# Altium PCB TeensyIMU.PcbDoc
Units mil, origin at the board's own origin, x right, y up, seen from the top; angles counter-clockwise.
Board outline 800 x 2320 mil, 2 copper layers (Top Layer, Bottom Layer); 38 components, 30 nets, 177 pads, 62 vias.
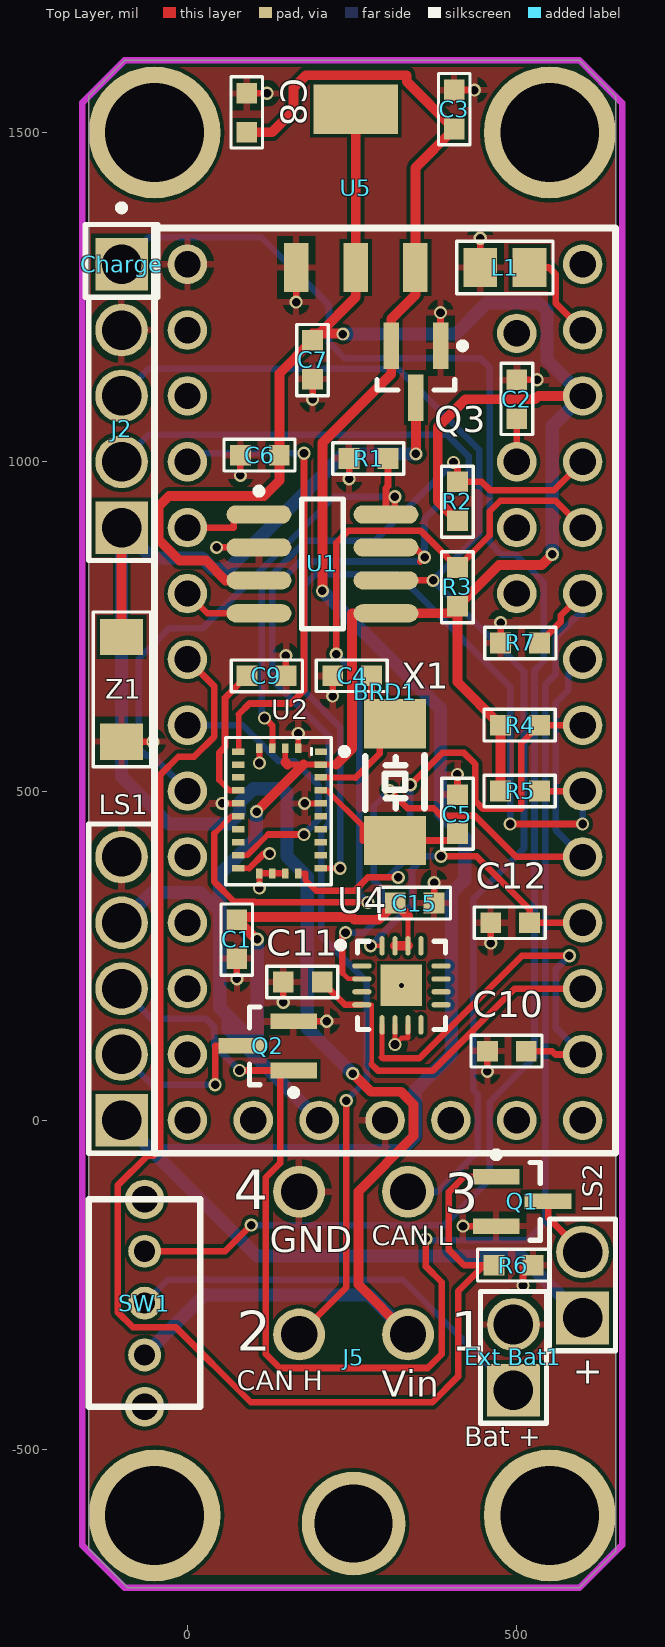
[diagram p0: Top Layer view]
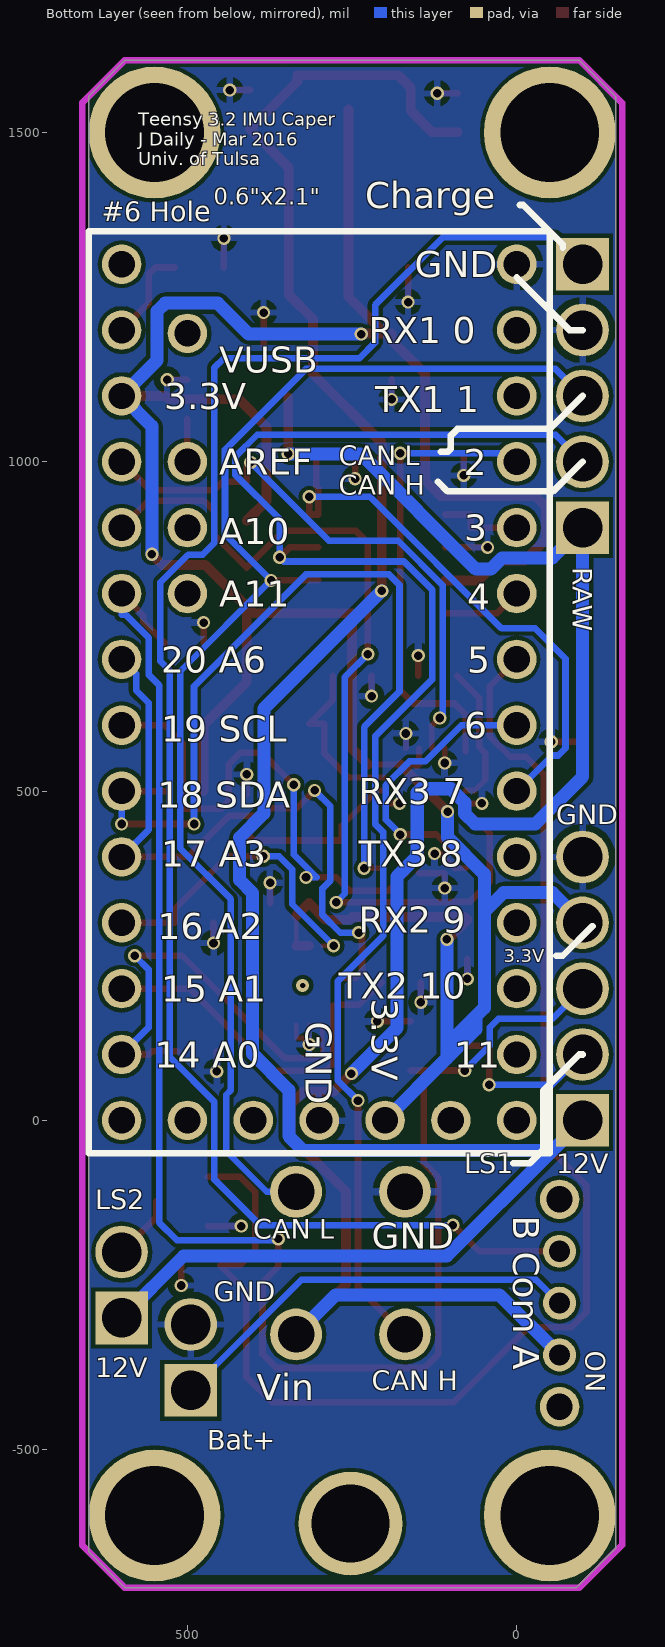
[diagram p1: Bottom Layer view, seen from below]

## Layer stack, top to bottom
Top Solder: solder mask 0.4, Solder Resist, Dk 3.5
Top Layer: signal copper 1.4
Dielectric 1: dielectric 12.6, FR-4, Dk 4.8
Bottom Layer: signal copper 1.4
Bottom Solder: solder mask 0.4, Solder Resist, Dk 3.5

## Board outline
-150,-650 -150,1555 -95,1610 595,1610 650,1555 650,-655 595,-710 -90,-710

## Design rules (kind name [scope] priority, off if disabled: settings)
BoardOutlineClearance [not InNet('GND')] p1: gap=15
Clearance [All] p1: gap=6
HoleSize [All] p1: absolutevalues=TRUE maxlimit=200 minlimit=13 maxpercent=80.000 minpercent=20.000
HoleToHoleClearance [All] p1: gap=10 allowstackedmicrovias=FALSE
MinimumAnnularRing MinimumAnnularRing_2 [All] p1: minimumring=8
PolygonConnect [All] p1: connectstyle=Relief reliefconductorwidth=10 reliefentries=4 polygonreliefangle="90 Angle" airgapwidth=10
RoutingVias [All] p1: holewidth=13 width=27 viastyle="Through Hole" minholewidth=13 minwidth=20 maxholewidth=30 maxwidth=30
SMDNeckDown [All] p1: percent=90.000
SolderMaskExpansion [All] p1: expansion=4
Width Width_1 [InNet('12V0') or InNet('3V3') or InNet('RAW')] p1: maxlimit=20 minlimit=7 preferedwidth=20 toplayer_prefwidth=15 bottomlayer_minwidth=15 minimp=50.000000 maximp=50.000000 favimp=50.000000
Width [All] p2: maxlimit=20 minlimit=7 preferedwidth=10 minimp=50.000000 maximp=50.000000 favimp=50.000000
28 further rules are at their usual default settings.

## Components (designator, comment, footprint, x,y, rotation, side; value= is the part's Value field where it differs from the comment)
BRD1 "Teensy 3.2" Teensy 0,0 r0 top
C1 "0.1 uF" 0603 75,275 r90 top
C2 "0.1 uF" 0603 500,1095 r270 top
C3 "10 uF" 0603 405,1535 r270 top
C4 "12 pF" 0603 250,675 r0 top
C5 "12 pF" 0603 410,465 r270 top
C6 "10 uF" 0603 110,1010 r0 top
C7 "10 uF" 0603 190,1155 r90 top
C8 "0.1 uF" 0603 90,1530 r270 top
C9 "10 uF" 0603 120,675 r180 top
C10 "0.0051uF" 0603 485,105 r0 top
C11 "0.0051uF" 0603 175,210 r0 top
C12 "0.0051uF" 0603 490,300 r0 top
C15 "0.1 uF" 0603 345,330 r180 top
Charge "Charge" PIN1 -100,1305 r0 top
"Ext Bat1" "Header 2" HDR1X2 495,-410 r90 top
J2 "Header" HDR1X4 -100,900 r90 top
J5 "4 Pos Mini-Fit Jr." "4 POS MINI-FIT JR" 335,-325 r0 top
L1 "80 Ohms" 0805 480,1295 r0 top
LS1 "Header 5" HDR1X5 -100,0 r90 top
LS2 "Header 2" HDR1X2 600,-300 r90 top
Q1 "N-FET" SOT-23-3 510,-125 r0 top
Q2 "N-FET" SOT-23-3 120,115 r180 top
Q3 "P-FET" SOT-23-3 345,1135 r270 top
R1 "4.7k" 0603 275,1005 r0 top
R2 "10k" 0603 410,940 r90 top
R3 "10k" 0603 410,810 r90 top
R4 "4.7k" 0603 505,600 r0 top
R5 "4.7k" 0603 505,500 r0 top
R6 "180k" 0603 495,-220 r0 top
R7 "180k" 0603 505,725 r180 top
SW1 "SPST Switch" "Slide Switch R/A" -65,-435 r90 top
U1 "MCP2562T-E/SN" SOIC-SN8_M 205,845 r0 top
U2 "BNO055" "BNO055 LGA" 140,470 r270 top
U4 "ADXL377BCPZ-RL" ADI-CP-16-28_N 325,205 r0 top
U5 "LDO1117" SOT-223 165,1295 r0 top
X1 "32.768KHz" "XTAL 2 pad" 315,425 r90 top
Z1 "SMA6J" SMA -100,575 r90 top

## Footprints (in the part's own frame and the unit in brackets; to place one, negate y for a bottom-side part, rotate by r counter-clockwise, add the part's x,y. Pads: shape width x height; smd on the part's side, far side on the other; paste and mask are expansions set on the pad)
"4 POS MINI-FIT JR" [mm] "Vertical Header"
  round 4 hole 3: 0(-2.1,-7.3)
  round 2 hole 1.4: 1(0,0) 2(-4.2,0) 3(0,5.5) 4(-4.2,5.5)
0603 [mm] "0603 SMP Component with outline"
  rect 0.8x0.8 smd: 1(-0.75,0) 2(0.75,0)
  silkscreen extent -1.39,-0.61 1.36,0.61
0805 [mm]
  rect 1.3x1.5 smd: 1(-0.899,0) 2(1.001,0)
  silkscreen extent -1.8,-1.02 1.91,1.02
ADI-CP-16-28_N [mm] "QFN, 16-Leads, Body 3x3mm, Pitch 0.5mm, Thermal Pad 1.6x1.6mm, IPC Medium Density"
  oval 0.75x0.2 smd: 1(-1.525,0.75) 2(-1.525,0.25) 3(-1.525,-0.25) 4(-1.525,-0.75) 9(1.525,-0.75) 10(1.525,-0.25) 11(1.525,0.25) 12(1.525,0.75)
  oval 0.2x0.75 smd: 5(-0.75,-1.525) 6(-0.25,-1.525) 7(0.25,-1.525) 8(0.75,-1.525) 13(0.75,1.525) 14(0.25,1.525) 15(-0.25,1.525) 16(-0.75,1.525)
  rect 1.6x1.6 smd: 17(0,0)
  silkscreen extent -2.47,-1.7 1.7,1.7, body extent -1.55,-1.55 1.55,1.55, height 1.5
"BNO055 LGA" [mm] "BOSCH BNO055  Intelligent 9-axis absolute orientation sensor"
  rect 0.25x0.475 smd: 1(-2.286,1.594) 6(-2.286,-1.594) 7(-1.786,-1.594) 8(-1.286,-1.594) 9(-0.786,-1.594) 10(-0.286,-1.594) 11(0.214,-1.594) 12(0.714,-1.594) 13(1.214,-1.594) 14(1.714,-1.594) 15(2.214,-1.594) 20(2.214,1.58) 21(1.714,1.58) 22(1.214,1.58) 23(0.714,1.58) 24(0.214,1.58) 25(-0.286,1.58) 26(-0.786,1.58) 27(-1.286,1.58) 28(-1.786,1.58)
  rect 0.375x0.25 smd paste+0: 2(-2.413,0.719)
  rect 0.375x0.25 smd: 3(-2.413,0.219) 4(-2.413,-0.281) 5(-2.413,-0.781) 16(2.413,-0.781) 17(2.413,-0.281) 18(2.413,0.219) 19(2.413,0.719)
  silkscreen extent -2.82,-2.08 2.85,2.62
HDR1X2 [mil] "Connector; Header; 2 Position"
  rect 80x80 hole 60: 1(0,0)
  round 80 hole 60: 2(100,0)
  silkscreen extent -50,-50 150,50
HDR1X4 [mil] "Connector; Header; 4 Position"
  rect 80x80 hole 60: 1(0,0)
  round 80 hole 60: 2(100,0) 3(200,0) 4(300,0)
  silkscreen extent -50,-50 350,50
HDR1X5 [mil] "Connector; Header; 5 Position"
  rect 80x80 hole 60: 1(0,0)
  round 80 hole 60: 2(100,0) 3(200,0) 4(300,0) 5(400,0)
  silkscreen extent -50,-50 450,50
PIN1 [mil] "Connector; Plug"
  rect 80x80 hole 60: 1(0,-5)
  silkscreen extent -55,-55 55,86
"Slide Switch R/A" [mil] "TE 185232-1: Slide Switches SLIDE SWITCH SPDT Right Angle"
  round 60 hole 40: 0(0,0) 0(314.96,0)
  round 50 hole 32: 1(78.74,0) 2(157.48,0) 3(236.22,0)
  silkscreen extent 0,-85 315,85
SMA [mil] "SMA with outline"
  rect 55x65 smd: 1(0,0) 2(159,0)
  silkscreen extent -38,-44 197,43
SOIC-SN8_M [mm] "SOIC, 8-Leads, Body 4.9x3.8mm, Pitch 1.27mm, IPC Low Density"
  oval 2.5x0.7 smd: 1(-2.45,1.905) 2(-2.45,0.635) 3(-2.45,-0.635) 4(-2.45,-1.905) 5(2.45,-1.905) 6(2.45,-0.635) 7(2.45,0.635) 8(2.45,1.905)
  silkscreen extent -2.57,-2.5 0.8,2.93, body extent -2,-2.5 2,2.5, height 1.75
SOT-23-3 [mm]
  rect 1.8x0.6 smd: D(0.954,0.048) G(-1.046,0.998) S(-1.046,-0.902)
  silkscreen extent -1.17,-1.45 0.65,1.97
SOT-223 [mm]
  rect 0.95x1.9 smd: 1(0,0) 2(2.3,0) 3(4.6,0)
  rect 3.25x1.9 smd: 4(2.3,6.1)
Teensy [mil] "32 bit Arduino Compatible Microcontroller www.pjrc.com/teensy"
  round 60 hole 40: 1(0,0) 2(0,100) 3(0,200) 4(0,300) 5(0,400) 6(0,500) 7(0,600) 8(0,700) 9(0,800) 10(0,900) 11(0,1000) 12(0,1100) 13(0,1200) 14(0,1300) 15(100,0) 16(200,0) 17(300,0) 18(400,0) 19(500,0) 20(600,0) 21(600,100) 22(600,200) 23(600,300) 24(600,400) 25(600,500) 26(600,600) 27(600,700) 28(600,800) 29(600,900) 30(600,1000) 31(600,1100) 32(600,1200) 33(600,1300) 34(500,1195) 35(500,1000) 36(500,900) 37(500,800)
  silkscreen extent -50,-50 650,1355
"XTAL 2 pad" [mm] "Digikey XC1659CT-ND"
  rect 1.9x2.4 smd: 1(0,0) 2(4.5,0)
  silkscreen extent 1.19,-1.14 3.28,1.14

## Part data
BRD1: library part Teensy, "32 Bit Arduino-Compatible Microcontroller"
C1 C2 C8 C15: library part Cap, "CAP CER 0.1UF 50V X7R 0603"
C3 C6 C7 C9: library part Cap, "CAP CER 10UF 25V X5R 0603"
C4 C5: library part Cap, "CAP CER 12PF 50V NP0 0603"
C10 C11 C12: library part Cap, "CAP CER 5100PF 50V U2J 0603"
Charge: library part Socket, "Socket"
"Ext Bat1" LS2: "Header, 2-Pin"
J2: library part "Header 4", "Header, 4-Pin"
J5: library part "4 Pos Header Vert", "CONN HEADER 4POS 4.2MM R/A TIN"
L1: library part "Ferrite Bead", "Ferrite Bead 80ohms 100MHz 5A Monolithic 0805 SMD"
LS1: "Header, 5-Pin"
Q1 Q2: library part "N-FET IRLML6344TRPbF", "IC INDCT LOAD DRVR AUTO SOT23"
Q3: "MOSFET P-CH 30V 4.3A SOT23"
R1 R4 R5: library part "Chip Resistor", "RES SMD 4.7K OHM 1% 1/10W 0603"
R2 R3: library part "Chip Resistor", "RES SMD 10K OHM 1% 1/10W 0603"
R6 R7: library part "Chip Resistor", "RES SMD 180K OHM 1% 1/10W 0603"
SW1: library part "SPDT Slide Switch", "SWITCH SLIDE SPDT 200MA 30V"
U1: library part MCP2551T-E/SN, "High-Speed CAN Transceiver, 8-Pin SOIC, Extended Temperature, Tape and Reel"
U2: "IMUs - Inertial Measurement Units Absolute Orientation 9-Axis Sensor"
U4: "3-Axis, +/-200 g Analog MEMS Accelerometer with Analog Output, 1.3 KHz BW, Industrial, 16-pin QFN, Reel"
U5: library part "NCP1117 2.5V", "IC REG LDO 3.3V 1A SOT223-3"
X1: library part "Crystal Oscillator", "Crystal 32.7680kHz 20ppm 12.5pF 70 kOhm -40°C - 85°C Surface Mount 2-SMD"
Z1: library part "Zener - Bidirectional", "TVS DIODE 15VWM 24.4VC SMA"

## Free pads (board coordinates)
  round 200 hole 150: 1(-50,-600) 1(-50,1500) 1(550,-600) 1(550,1500)

## Via types
v1: diameter 20, hole 13, Top Layer to Bottom Layer, 61 vias
v2: diameter 19.68, hole 7.87, Top Layer to Bottom Layer, 1 vias

## Nets (pads, with @x,y where several pads share a name; then routed paths per layer and width w, separated by ;. In a path a pad name is that pad's centre, name@x,y a point inside that pad or via, vN(x,y) a via of type N, cw(c..) or ccw(c..) an arc to the next point about the centre after c; other vN are vias at no path point)
3V3: BRD1.16 BRD1.31 C1.2 C6.2 C7.2 C15.2 LS1.4 R2.1 R3.1 R4.1 R5.1 U1.3 U1.5 U2.3 U2.28 U4.14 U4.15 U5.2 U5.4 | length 4694
  Top Layer w7.09: U4.14 334.84,310.63
  Top Layer w8.86: 148.61,543.7 U2.3 ; 152,540.32 176.32,540.32 U2.28 226,540.32
  Top Layer w15: v1(104.9,468.9) 176.32,540.32 ; v1(106,275) 104.53,275 C1.2 78.97,308.5 249.73,308.5 253.71,304.53 290,304.53 C15.2 334.84,310.63 ; U1.3 58,820 28,850 -12,850 -44,882 -44,932 -28,948 116,948 139.53,971.53 C6.2 139.53,1134.06 C7.2 ; 148.61,543.7 152,540.32 ; 226,540.32 250,564.32 250,770 U1.5 399.53,770 R3.1 ; v1(236,1194) 235,1195 C7.2@200.47,1195 ; U5.4 U5.2 255.55,1250.08 C7.2@200.47,1195 ; U4.15 U4.14 ; R2.1 380,940.47 380,1053 422,1095 528,1095 533,1100 BRD1.31 ; R5.1 R4.1 410,665.47 R3.1 ; v1(554,859.5) 538,843.5 473.03,843.5 R3.1 ; C7.2 C7.2@200.47,1195 ; C7.2 190,1195 C7.2@200.47,1195
  Bottom Layer w20: LS1.4 -54,346 20,346 49,317 ; v1(104.9,468.9) 104.9,429.9 49,374 49,317 ; v1(106,275) 106,114 ; BRD1.16 106,94 ; v1(236,1194) 407,1194 454,1241 534,1241 546,1229 546,1154 BRD1.31 554,1054 v1(554,859.5) ; 49,317 49,171 62,158 ; 62,158 106,114 ; 62,158 62,138 106,94 ; 106,94 106,114
12V0: C3.2 C8.2 LS1.1 LS2.1 Q3.S U5.3 | length 3376.9
  Top Layer w15: C8.2 128.47,1500.47 161,1533 161,1568 180,1587 333,1587 333,1577.47 C3.2 346.1,1446.57 U5.3 346.1,1253.61 309.49,1217 Q3.S 309.49,1133.49 205,1029 v1(205,804)
  Bottom Layer w20: LS1.1 -54,-46 ; v1(205,804) 384,625 384,466.19 421,429.19 421,365 401,345 401,101 346,46 346,-24 324,-46 -54,-46 ; LS2.1 506,-206 106,-206 -54,-46
GND: "Ext Bat1.2" BRD1.14 BRD1.17 C1.1 C2.1 C3.1 C4.1 C5.1 C6.1 C7.1 C8.1 C9.1 C10.1 C11.1 C12.1 C15.1 J2.4 J5.4 L1.1 LS1.5 Q1.S Q2.S Q3.G R1.1 R6.2 R7.2 U1.2 U2.2 U2.5 U2.10 U2.15 U2.16 U2.17 U2.18 U2.25 U4.6 U4.7 U5.1 Z1.1 | length 1137.3
  Top Layer w7.09: U4.6 v1(315.16,115.2) 324.96,125 334.84,125 U4.7
  Top Layer w8.86: v1(52.9,481.26) U2.10 ; U2.15 93.86,382.84 ; v1(109.24,352.62) U2.16 ; v1(109.24,542.62) U2.5 ; U2.2 v1(168.3,587.38) ; v1(177.84,481.26) U2.25
  Top Layer w10: Z1.1 v1(-52.5,575) ; v1(44.33,870) U1.2 ; v1(75,214.73) C1.1 ; v1(80.47,979.25) C6.1 ; C8.1 v1(120.75,1559.53) ; 93.86,382.84 116.02,405 v1(124.79,405) ; U2.16 U2.17 U2.18 ; v1(145.47,179.25) C11.1 ; C9.1 v1(149.53,705.75) ; Q2.S v1(211.62,150.51) ; v1(165,1242.6) U5.1 ; v1(190,1094.73) C7.1 ; v1(220.47,644.25) C4.1 ; v1(245.47,974.25) R1.1 ; C15.1 v1(374.53,360.75) ; Q3.G v1(384.29,1226.62) ; C3.1 v1(435.75,1564.53) ; C5.1 v1(410,525.27) ; v1(418.38,-160.51) Q1.S ; L1.1 v1(444.6,1339.53) ; v1(455.47,74.25) C10.1 ; v1(460.47,269.25) C12.1 ; R7.2 v1(475.47,755.75) ; C2.1 v1(530.75,1124.53) ; v1(509.53,-250.75) R6.2@509.53,-220
NetBRD1_6: BRD1.6 R1.2 U1.8 | length 854.6
  Top Layer w10: R1.2 304.53,963.07 301.46,960 U1.8 315,920 v1(315,947)
  Bottom Layer w10: BRD1.6 -54,554 -63,554 -74,565 -74,701 -28,747 23,747 223,947 v1(315,947)
NetBRD1_7: BRD1.7 U2.14 | length 433.6
  Top Layer w8.86: U2.14 90.91,402.52 122.39,434
  Top Layer w10: 122.39,434 v1(177,434)
  Bottom Layer w10: BRD1.7 84,600 139,545 163,545 199,509 199,456.72 177,434.72 v1(177,434)
NetBRD1_8: BRD1.8 Q1.G R6.1 | length 2096.1
  Top Layer w10: BRD1.8 41,659 41,583.02 9.98,552 -14,552 -41,525 -41,-43 -52,-54 -61,-54 -106,-99 -106,-291 -83,-314 -18,-314 96,-428 372,-428 411,-389 411,-259.47 450.47,-220 420,-220 397,-197 397,-108.71 420,-85.71 Q1.G
NetBRD1_9: BRD1.9 U1.4 | length 121
  Top Layer w10: BRD1.9 30,770 U1.4
NetBRD1_10: BRD1.10 U1.1 | length 128.5
  Top Layer w10: BRD1.10 70.02,900 70.02,920 U1.1
NetBRD1_11: BRD1.11 U2.6 | length 713.8
  Top Layer w8.86: U2.6 78,560 78,616.55
  Top Layer w10: 78,616.55 94.41,632.96 156.96,632.96 177,653 v1(177,1013)
  Bottom Layer w10: BRD1.11 13,1013 v1(177,1013)
NetBRD1_21: BRD1.21 C10.2 U4.5 | length 662.4
  Top Layer w7.09: 295.47,95.53 U4.5
  Top Layer w10: 295.47,95.53 297,94 352,94 508,250 v1(580,250) ; C10.2 554,105 559,100 BRD1.21
  Bottom Layer w10: v1(580,250) 559,229 559,141 BRD1.21
NetBRD1_22: BRD1.22 C11.2 U4.4 | length 556.2
  Top Layer w7.09: U4.4 280,175.47 280,85
  Top Layer w10: C11.2 239.06,175.47 U4.4 ; 280,85 290,75 372,75 497,200 BRD1.22
NetBRD1_23: BRD1.23 C12.2 U4.16 | length 480.7
  Top Layer w7.09: v1(278,265) U4.16
  Top Layer w10: v1(385,401) 439,401 519.53,320.47 C12.2 BRD1.23
  Bottom Layer w10: v1(278,265) 341,328 341,381 361,401 v1(385,401)
NetBRD1_24: BRD1.24 BRD1.27 U4.2 | length 1035.8
  Top Layer w7.09: 235,223.84 244,214.84 U4.2
  Top Layer w10: 235,223.84 235,280 v1(240,285) ; v1(307,501) 334,474 374,474 385.78,462.22 437,462.22 499.22,400 BRD1.24
  Bottom Layer w10: v1(240,285) 268,285 295,312 295,352 283,364 283,477 v1(307,501) ; BRD1.24 559,441 559,634 577.95,652.96 577.95,677.95 BRD1.27
NetBRD1_25: BRD1.25 R5.2 U2.20 | length 1305.6
  Top Layer w8.86: U2.20 v1(231.83,382.84)
  Top Layer w10: v1(490,450) v1(600,450) ; R5.2 BRD1.25
  Bottom Layer w10: v1(231.83,382.84) 231.83,597.17 178,651 178,813 194,829 320,829 490,659 v1(490,450) ; v1(600,450) BRD1.25
NetBRD1_26: BRD1.26 R4.2 U2.19 | length 808.3
  Top Layer w8.86: U2.19 179,375 179,365 195.53,348.47
  Top Layer w10: 195.53,348.47 253.63,348.47 274.16,369 v1(320,369) ; v1(338.62,509.62) 387,558 420,558 437,541 437,485 449,473 507,473 507,572.47 R4.2 BRD1.26
  Bottom Layer w10: v1(320,369) 304,369 338.62,403.62 v1(338.62,509.62)
NetBRD1_28: BRD1.28 LS1.3 Q2.G R7.1 | length 2515.1
  Top Layer w10: v1(79,75.71) Q2.G@141,75.71 ; Q2.G Q2.G@141,75.71 ; v1(362,-180) 362,-222 386,-246 386,-355 365,-376 140,-376 119,-355 119,-87 141,-65 Q2.G@141,75.71 ; R7.1 567,757.47 567,767 BRD1.28
  Bottom Layer w10: LS1.3 -54,154 28,154 41,141 41,113.71 v1(79,75.71) ; v1(362,-180) 364,-182 516,-182 543,-155 543,661 559,677 559,733 594,768 600,768 BRD1.28
NetBRD1_29: BRD1.29 R3.2 U2.11 | length 1417.1
  Top Layer w8.86: 41,435.58 67,461.58 U2.11
  Top Layer w10: 41,435.58 41,362 71,332 102,332 103,331 v1(274,331) ; v1(226,708) 226,877 244,895 354.53,895 R3.2 459,888.53 459,925 475,941 559,941 BRD1.29
  Bottom Layer w10: v1(226,708) 261,673 261,344 v1(274,331)
NetBRD1_30: BRD1.30 R2.2 U2.4 | length 868
  Top Layer w8.86: U2.4 128.93,599.07
  Top Layer w10: v1(117,611) 128.93,599.07 ; v1(404,999) 410,993 R2.2 447,969.53 459.53,957 557,957 BRD1.30
  Bottom Layer w10: v1(117,611) 112.53,615.47 112.53,812.53 180,880 285,880 v1(404,999)
NetBRD1_32: BRD1.32 L1.2 | length 145.7
  Top Layer w10: L1.2 549,1295 559,1285 559,1241 BRD1.32
NetBRD1_35: BRD1.35 C2.2 | length 65.5
  Top Layer w10: BRD1.35 C2.2
NetC4_2: C4.2 U2.27 X1.2 | length 260.6
  Top Layer w8.86: U2.27 255.68,520.63
  Top Layer w10: 255.68,520.63 292,556.95 292,602.17 X1.2 279.53,637.64 C4.2
NetC5_2: C5.2 U2.26 X1.1 | length 256.5
  Top Layer w8.86: U2.26 212,500.95 266,446.95
  Top Layer w10: 266,446.95 266,425 X1.1 399.53,425 C5.2
NetC9_2: C9.2 U2.9 | length 211.5
  Top Layer w8.86: 48,516.95 64,500.95 U2.9
  Top Layer w10: 48,516.95 48,558.02 57,567.02 57,641.53 C9.2
NetCharge_1: Charge.1 SW1.3 | length 2574.3
  Top Layer w10: SW1.3 57.22,-198.78 v1(97,-159)
  Bottom Layer w10: Charge.1 -59,1341 112,1341 215,1238 215,1181 239,1157 445,1157 459,1143 459,877 477,859 498.98,859 541,816.98 541,697 527,683 527,96 459,28 459,-90 390,-159 v1(97,-159)
"NetExt Bat1_1": "Ext Bat1.1" SW1.2 | length 644.3
  Bottom Layer w10: SW1.2 -29.48,-242 327,-242 495,-410
NetJ2_2: J2.2 J5.2 U1.7 | length 2297.6
  Top Layer w10: J5.2 241,-253.65 v1(241,30) ; U1.7 345,870 v1(360,855) v1@353.57,848.57
  Bottom Layer w10: J2.2 -59,1041 394,1041 427,1008 427,980 360,913 v1(360,855) ; v1(241,30) 272,61 272,211 203,280 203,438 215,450 215,583 128.53,669.47 128.53,805.9 171.2,848.57 v1@353.57,848.57
NetJ2_3: J2.3 J5.3 U1.6 | length 1999.9
  Top Layer w10: U1.6 v1(373,820)
  Bottom Layer w10: J2.3 -59,1141 320,1141 443,1018 443,890 v1(373,820) 511,682 511,413 434,336 434,46 441,39 441,-47 379.54,-108.46 J5.3
NetLS1_2: LS1.2 Q2.D | length 260.6
  Top Layer w10: v1(42,54) 42,113.11 Q2.D
  Bottom Layer w10: LS1.2 -54,54 v1(42,54)
NetLS2_2: LS2.2 Q1.D | length 98.6
  Top Layer w10: Q1.D 547.56,-147.56 LS2.2
RAW: J2.1 J5.1 Q3.D SW1.1 Z1.2 | length 2947.8
  Top Layer w15: Z1.2 J2.1 ; v1(251,71) 278.5,43.5 324,43.5 343.5,24 343.5,-24 259.5,-108 259.5,-249.5 J5.1 ; v1(346.89,1012) Q3.D
  Bottom Layer w20: SW1.1 26.26,-265 275,-265 J5.1 ; v1(251,71) 182,140 182,370 151,401 151,497.62 145.1,503.52 100,503.52 78.9,482.42 78.9,465.9 63,450 -28,450 -100,522 J2.1 -54,854 22.16,854 39.16,837 62.05,837 237.05,1012 v1(346.89,1012)
pads on no net: BRD1.1 BRD1.2 BRD1.3 BRD1.4 BRD1.5 BRD1.12 BRD1.13 BRD1.15 BRD1.18 BRD1.19 BRD1.20 BRD1.33 BRD1.34 BRD1.36 BRD1.37 J5.0 SW1.0 U2.1 U2.7 U2.8 U2.12 U2.13 U2.21 U2.22 U2.23 U2.24 U4.1 U4.3 U4.8 U4.9 U4.10 U4.11 U4.12 U4.13 U4.17
copper on no net:
  other v2: 325,205

## Polygon pours and split planes (outlines as drawn)
GND on Top Layer "GND_L01_P000" (solid, remove dead copper, pour order 0): -150,-560 -150,1555 -95,1610 595,1610 650,1555 650,-560 520,-690 -20,-690
GND on Bottom Layer "GND_L02_P001" (solid, remove dead copper, pour order 1): -150,-560 -150,1555 -95,1610 595,1610 650,1555 650,-560 520,-690 -20,-690

## Keep-outs
Keep-Out Layer:
  lines w10: -160,-645 -95,-710 595,-710 660,-645 660,1545 595,1610 -95,1610 -160,1545 -160,-255 -160,-645

## Silkscreen, mask and mechanical layers (free items; w line width, h text height)
Top Overlay:
  text "CAN L" at 280,-190 h30
  text "GND" at 125,-200 h40
  text "+" at 585,-400 h40
  text "CAN H" at 75,-410 h30
  text "Vin" at 295,-420 h40
  text "Bat +" at 420,-495 h30
Bottom Overlay:
  lines w10: -115,295 -70,250 -60,250 ; -100,100 -95,100 -40,45 -40,-45 -20,-65 5,-65 ; -100,1000 -55,955 -20,955 55,955 105,955 120,970 ; -100,1100 -50,1050 90,1050 100,1040 100,1020 105,1015 115,1015 ; -100,1200 -80,1200 0,1280 ; -70,1325 -70,1330 -10,1390 -5,1390
  text "Teensy 3.2 IMU Caper / J Daily - Mar 2016 / Univ. of Tulsa" at 575,1450 h20
  text "0.6\"x2.1\"" at 460,1390 h25
  text "#6 Hole" at 630,1365 h30
  text "CAN L / CAN H" at 270,950 h30
  text "RAW" at -85,840 h30 r90
  text "GND" at -60,450 h30
  text "3.3V" at 20,240 h20
  text "12V" at -60,-80 h30
  text "LS1" at 80,-80 h30
  text "LS2" at 640,-135 h30
  text "CAN L" at 400,-180 h30
  text "GND" at 220,-195 h40
  text "GND" at 460,-275 h30
  text "ON" at -105,-350 h30 r90
  text "12V" at 640,-390 h30
  text "CAN H" at 220,-410 h30
  text "Vin" at 395,-425 h40
  text "Bat+" at 470,-500 h30

## Dimensions
-160,-255 to 660,-645 on Mechanical 1
-95,1610 to -100,-710 on Mechanical 1
-50,-600 to 550,-600 on Mechanical 1
-50,1500 to -50,-600 on Mechanical 1

## Text inside footprints (layer, text, board x,y; h text height)
BRD1: Bottom Overlay "14 A0" at 550,80 h40; Bottom Overlay "15 A1" at 540,180 h40; Bottom Overlay "16 A2" at 545,275 h40; Bottom Overlay "17 A3" at 540,385 h40; Bottom Overlay "18 SDA" at 545,475 h40; Bottom Overlay "19 SCL" at 540,575 h40; Bottom Overlay "20 A6" at 540,680 h40; Bottom Overlay "VUSB" at 451.62,1135 h40; Bottom Overlay "AREF" at 451.62,980 h40; Bottom Overlay "A10" at 451.62,875 h40; Bottom Overlay "A11" at 451.62,780 h40; Bottom Overlay "3" at 80,880 h40; Bottom Overlay "4" at 75,775 h40; Bottom Overlay "GND" at 155,1280 h40; Bottom Overlay "RX1 0" at 225,1180 h40; Bottom Overlay "RX3 7" at 240,480 h40; Bottom Overlay "TX3 8" at 240,385 h40; Bottom Overlay "11" at 95,80 h40; Bottom Overlay "TX1 1" at 215,1075 h40; Bottom Overlay "RX2 9" at 240,285 h40; Bottom Overlay "TX2 10" at 270,185 h40; Bottom Overlay "2" at 80.47,979.25 h40; Bottom Overlay "5" at 75,680 h40; Bottom Overlay "6" at 80,580 h40; Bottom Overlay "GND" at 320,150 h40 r90; Bottom Overlay "3.3V" at 220,185 h40 r90; Bottom Overlay "3.3V" at 535,1080 h40
J5: Top Overlay "1" at 400,-350 h60; Top Overlay "3" at 390,-140 h60; Top Overlay "4" at 70,-135 h60; Top Overlay "2" at 75,-350 h60
SW1: Bottom Overlay "B Com A" at 5,-145 h40 r90